# Altium PCB 70cm_13cm_diplexer.PcbDoc
Units mm, origin at the board's own origin, x right, y up, seen from the top; angles counter-clockwise.
Board outline 27.81 x 17.78 mm, 2 copper layers (Top Layer, Bottom Layer); 4 components, 4 nets, 20 pads, 93 vias.
Unrouted connection lines stored in the file: 2.
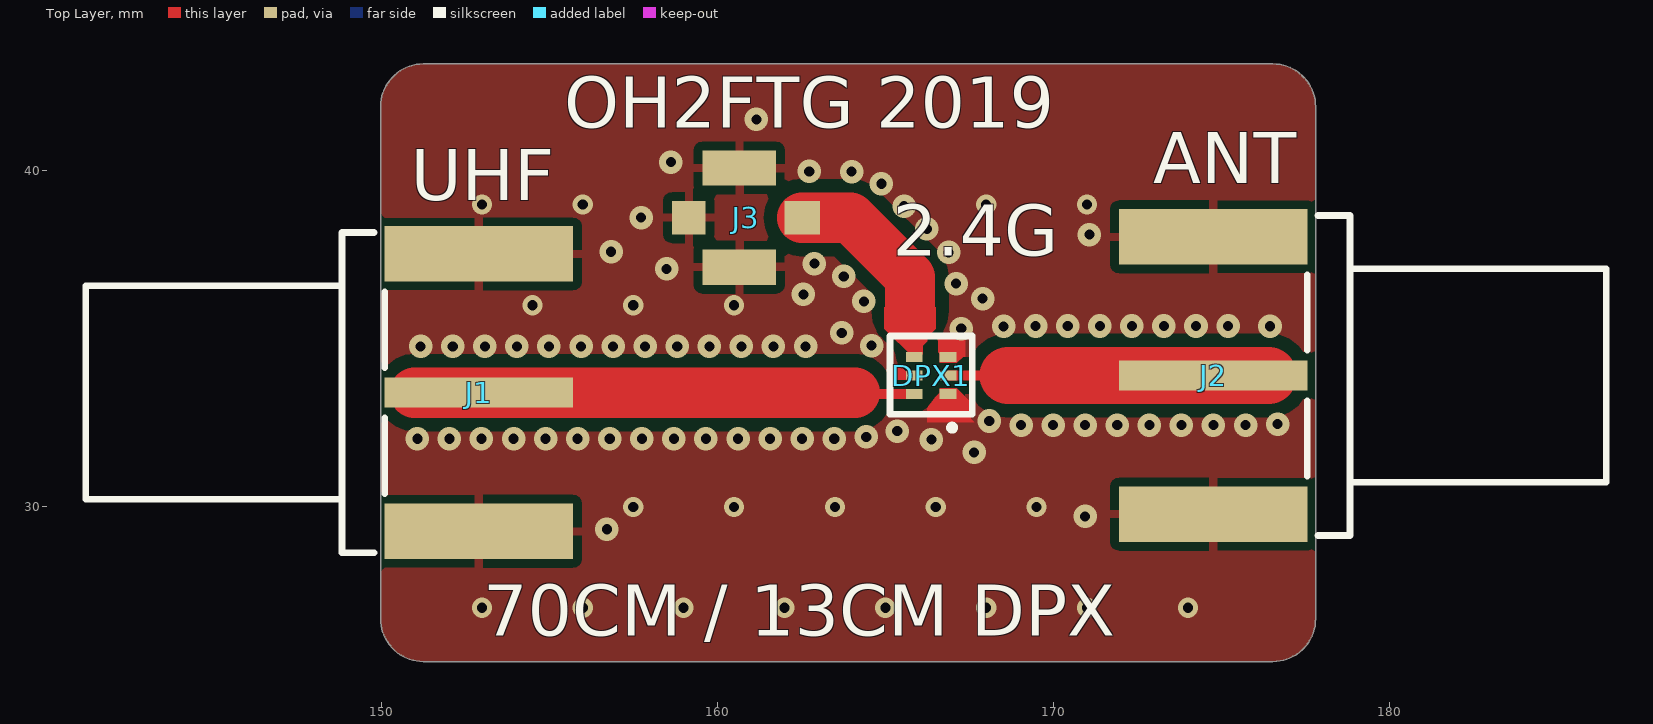
[diagram p0: Top Layer view]
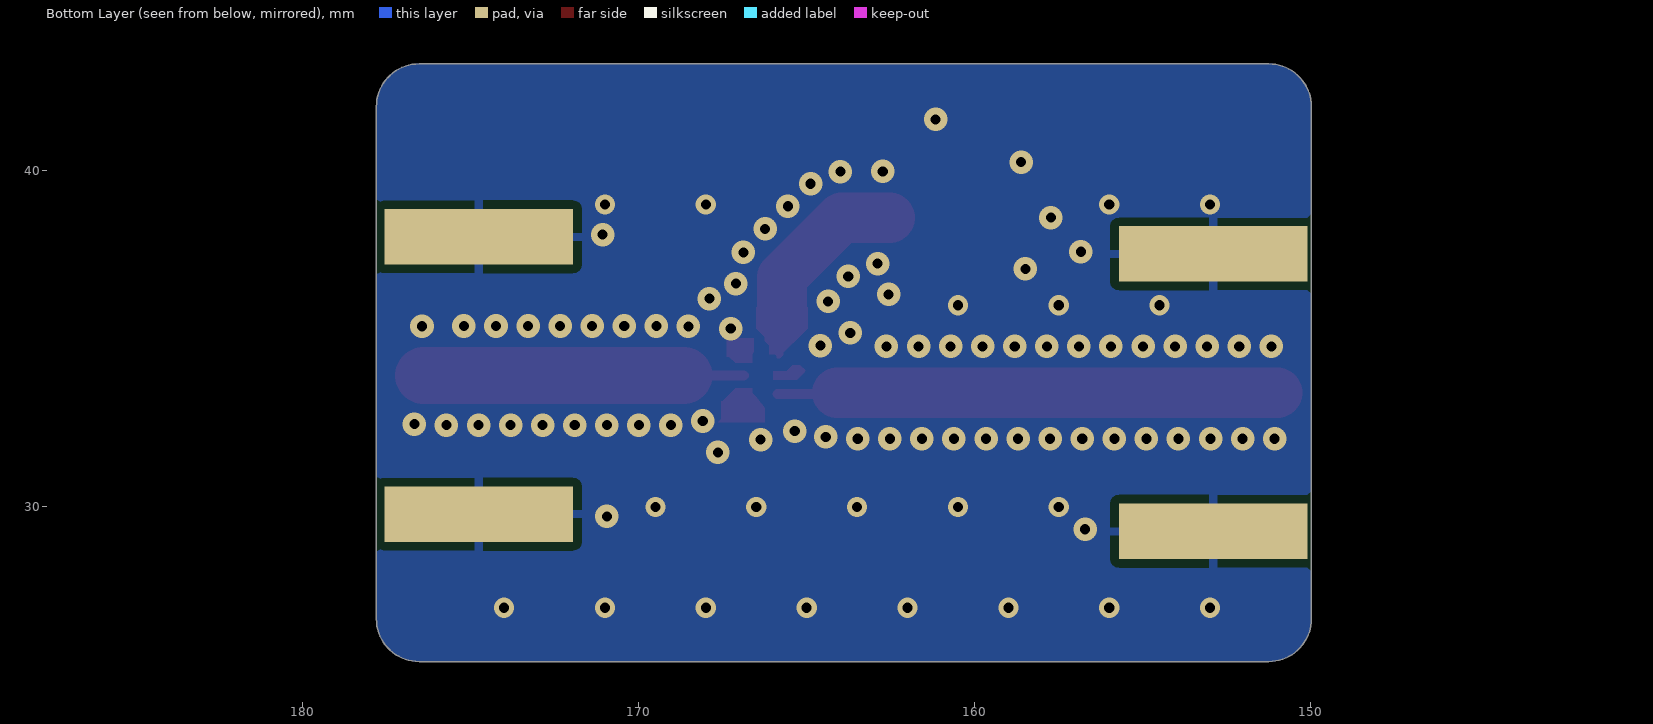
[diagram p1: Bottom Layer view, seen from below]
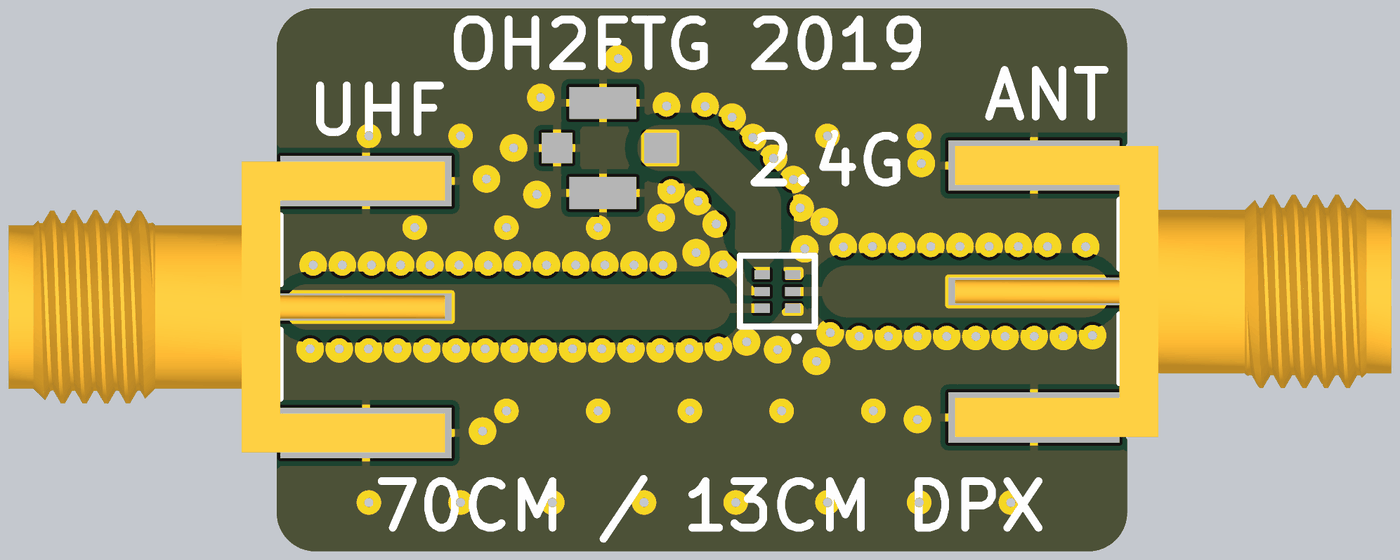
[diagram p2: 3D render of the assembled board from above, using the file's embedded part models]

## Layer stack, top to bottom
Top Solder: solder mask 0.0102, Solder Resist, Dk 3.5
Top Layer: signal copper 0.0356
Dielectric 1: dielectric 0.32, FR-4, Dk 4.8
Bottom Layer: signal copper 0.0356
Bottom Solder: solder mask 0.0102, Solder Resist, Dk 3.5

## Board outline
149.987,26.67 ccw(c151.257,26.67) 151.257,25.4 176.53,25.4 ccw(c176.53,26.67) 177.8,26.67 177.8,41.91 ccw(c176.53,41.91) 176.53,43.18 151.257,43.18 ccw(c151.257,41.91) 149.987,41.91

## Design rules (kind name [scope] priority, off if disabled: settings)
Clearance [All] p1: gap=0.254 ignorepadtopadclearanceinfootprint=FALSE except(0: Arc-Hole Track-Hole SMDPad-Hole THPad-Hole Via-Hole Fill-Hole Poly-Hole Region-Hole Text-Hole; 0.4: Arc-Fill Arc-Poly Arc-Region Track-Fill Track-Poly Track-Region)
PolygonConnect [All] p1: connectstyle=Relief reliefconductorwidth=0.254 reliefentries=4 polygonreliefangle="90 Angle" airgapwidth=0.254
RoutingVias [All] p1: holewidth=0.711 width=1.27 viastyle="Through Hole" minholewidth=0.711 minwidth=1.27 maxholewidth=0.711 maxwidth=1.27
SolderMaskExpansion [All] p1: expansion=0.102
Width [All] p1: maxlimit=1.7 minlimit=0.254 preferedwidth=1.7
30 further rules are at their usual default settings.

## Components (designator, comment, footprint, x,y, rotation, side; value= is the part's Value field where it differs from the comment)
DPX1 "DPX 430-960MHz/1700-2700MHz" "1.6x0.8mm [EIA 0603]" 166.862,33.359 r90 top
J1 "60312202114509" 60312202114509 152.908,33.401 r270 top
J2 "60312202114509" 60312202114509 174.752,33.909 r90 top
J3 "u.fl jack smd" "U.FL jack" 160.655,38.608 r0 top

## Footprints (in the part's own frame and the unit in brackets; to place one, negate y for a bottom-side part, rotate by r counter-clockwise, add the part's x,y. Pads: shape width x height; smd on the part's side, far side on the other; paste and mask are expansions set on the pad)
"1.6x0.8mm [EIA 0603]" [mm] "HHM22106C1 case"
  rect 0.3x0.5 smd: 1(0,0) 2(0.55,0) 3(1.1,0) 4(1.1,1) 5(0.55,1) 6(0,1)
  silkscreen extent -1.05,-0.72 1.73,1.73, body extent -0.25,0.1 1.35,0.9, height 0.6
60312202114509 [mm] "SMA PCB End Launch Jack Round  Post for 1.6mm PCB"
  rect 0.9x5.6 smd: 1(0,0)
  rect 1.65x5.6 smd: 2(-4.125,0) 3(4.125,0)
  rect 1.65x5.6 smd far side: 4(-4.125,0) 5(4.125,0)
  silkscreen extent -4.76,-11.69 4.76,-2.8, body extent -4.76,-11.69 4.76,2.58, height 4.36
"U.FL jack" [mm] "U.FL smd jack AMPhenol RF AMC series"
  rect 1.05x1 smd: 1(1.875,0)
  rect 1x1 smd: 2(-1.5,0)
  rect 2.2x1.05 smd: 2(0,-1.475) 2(0,1.475)
  body extent -1.5,-1.5 1.6,1.5, height 1.25

## Part data
DPX1: library part DPX202700DT-4062A1, "Diplexer 430-960MHz/1700-2700MHz 0603", Case Code (Imperial)=0805, Case Code (Metric)=2012, Manufacturer=TDK, Supplier Part Number 1=810-DPX20270DT4062A1, Manufacturer 1=TDK, Manufacturer Part Number=DPX202700DT-4062A1, Mount="Surface Mount", Packaging="Tape and Reel", Stock 1=2639, Supplier 1=Mouser
J1 J2: "WR-SMA SMA PCB End Launch Jack Round Post for 1.6 mm PCB", Frequency Range="DC~18 GHz", Operating Temperature="-65 to 165 degC", ComponentLink1Description=Manufacturer, ComponentLink1URL=http://www.we-online.de, ComponentLink2Description=Datasheet, ComponentLink2URL=https://katalog.we-online.de/em/datasheet/60312202114509.pdf, Connector Type=SMA, Gender=Jack, Impedance="50 Ohm", Mounting Technology=SMT, Orientation Type=Straight, Packaging=Tray, Part Number=60312202114509, Published Date="August 2018", Publisher="Wurth Elektronik"
J3: library part "u.fl connector, jack A-1JB", Frequency Max=6GHz, Manufacturer 1="Amphenol / Amphenol RF", Manufacturer Part Number 1=A-1JB, Supplier Part Number 1=523-A-1JB, Body Style="Straight Jack", Coaxial Termination=Solder, ComponentLink1Description=https://datasheet.ciiva.com/22652/689597-22652949.pdf, ComponentLink1URL=https://datasheet.ciiva.com/22652/689597-22652949.pdf, ComponentLink2Description=https://datasheet.ciiva.com/15172/getdatasheetpartid-168895-15172647.pdf, ComponentLink2URL=https://datasheet.ciiva.com/15172/getdatasheetpartid-168895-15172647.pdf, ComponentLink3Description=https://datasheet.ciiva.com/36526/2036357-36526267.pdf, ComponentLink3URL=https://datasheet.ciiva.com/36526/2036357-36526267.pdf, ComponentLink4Description=https://datasheet.ciiva.com/5175/ca-1jb-38743-5175829.pdf, ComponentLink4URL=https://datasheet.ciiva.com/5175/ca-1jb-38743-5175829.pdf, ComponentLink5Description=https://datasheet.ciiva.com/3132/ca-1jb-3132240.pdf, ComponentLink5URL=https://datasheet.ciiva.com/3132/ca-1jb-3132240.pdf, ComponentLink6Description=https://datasheet.ciiva.com/14157/04614608-14157589.pdf, ComponentLink6URL=https://datasheet.ciiva.com/14157/04614608-14157589.pdf, ComponentLink7Description=https://datasheet.ciiva.com/643/ca-1jb-643532.pdf, ComponentLink7URL=https://datasheet.ciiva.com/643/ca-1jb-643532.pdf, ComponentLink8Description=https://datasheet.ciiva.com/14565/70142555-14565783.pdf, ComponentLink8URL=https://datasheet.ciiva.com/14565/70142555-14565783.pdf, ComponentLink9Description=https://datasheet.ciiva.com/643/ca-1jb-643531.pdf, ComponentLink9URL=https://datasheet.ciiva.com/643/ca-1jb-643531.pdf, Connector Type="AMC Coaxial", Contact Material=Brass, Contact Plating=Gold, Impedance=50ohm, Pricing 1="1=0.65, 10=0.596, 50=0.535, 100=0.51, 1000=0.365, 10000=0.351 (USD)", Stock 1=19506, Supplier 1=Mouser

## Via types
v1: diameter 0.7, hole 0.3, Top Layer to Bottom Layer, 73 vias
v2: diameter 0.6, hole 0.3, Top Layer to Bottom Layer, 20 vias

## Nets (pads, with @x,y where several pads share a name; then routed paths per layer and width w, separated by ;. In a path a pad name is that pad's centre, name@x,y a point inside that pad or via, vN(x,y) a via of type N, cw(c..) or ccw(c..) an arc to the next point about the centre after c; other vN are vias at no path point)
GND: DPX1.1 DPX1.3 DPX1.5 J1.2 J1.3 J1.4 J1.5 J2.2 J2.3 J2.4 J2.5 J3.2
  other v1: 156.718,29.337 170.942,29.718 167.64,31.623 166.37,32.004 167.894,36.195 162.56,36.322 158.496,37.084 156.845,37.592 171.069,38.1 157.734,38.608 158.623,40.259 161.163,41.529
  other v2: 153,27 156,27 159,27 162,27 165,27 168,27 171,27 174,27 157.5,30 160.5,30 163.5,30 166.5,30 169.5,30 154.5,36 157.5,36 160.5,36 153,39 156,39 168,39 171,39
NetDPX1_2: DPX1.2 J2.1 | length 7.7
  Top Layer w1.7: 168.656,33.909 J2.1 J2.1@176.403,33.909
NetDPX1_4: DPX1.4 J3.1 | length 5
  Top Layer w1.5: J3.1 163.957,38.608 165.735,36.83 165.735,35.814
NetDPX1_6: DPX1.6 J1.1 | length 13.1
  Top Layer w1.5: J1.1@151.003,33.401 J1.1 164.084,33.401
copper on no net: | length 4.5
  Top Layer w0.1: 164.592,33.274 cw(c164.677,33.274) 164.677,33.359 ; 165.735,35.814 165.735,34.586 ccw(c165.862,34.586) 165.862,34.459
  Top Layer w0.3: 164.677,33.359 165.862,33.359 ; 166.862,33.909 168.656,33.909
  other v1: 151.078,32.029 152.032,32.029 152.986,32.029 153.94,32.029 154.894,32.029 155.848,32.029 156.802,32.029 157.756,32.029 158.71,32.029 159.664,32.029 160.618,32.029 161.572,32.029 162.526,32.029 163.48,32.029 164.433,32.084 165.354,32.258 169.038,32.436 169.992,32.436 170.946,32.436 171.9,32.436 172.854,32.436 173.808,32.436 174.762,32.436 175.716,32.436 176.669,32.466 168.091,32.556 151.178,34.773 152.132,34.773 153.086,34.773 154.04,34.773 154.994,34.773 155.948,34.773 156.902,34.773 157.856,34.773 158.81,34.773 159.764,34.773 160.718,34.773 161.672,34.773 162.626,34.773 164.592,34.798 163.703,35.179 167.259,35.306 168.518,35.369 169.472,35.382 170.426,35.382 171.38,35.382 172.334,35.382 173.288,35.382 174.242,35.382 175.196,35.382 176.443,35.374 164.363,36.117 167.107,36.644 163.764,36.86 162.887,37.236 166.884,37.571 166.235,38.271 165.561,38.945 164.881,39.615 162.736,39.98 163.997,39.972

## Polygon pours and split planes (outlines as drawn)
GND on Top Layer "Top Layer-GND" (solid, pour order 0): 149.987,26.67 ccw(c151.257,26.67) 151.257,25.4 176.53,25.4 ccw(c176.53,26.67) 177.8,26.67 177.8,41.91 ccw(c176.53,41.91) 176.53,43.18 151.257,43.18 ccw(c151.257,41.91) 149.987,41.91
GND on Bottom Layer "Bottom Layer-GND" (solid, pour order 1): 149.987,26.67 ccw(c151.257,26.67) 151.257,25.4 176.53,25.4 ccw(c176.53,26.67) 177.8,26.67 177.8,41.91 ccw(c176.53,41.91) 176.53,43.18 151.257,43.18 ccw(c151.257,41.91) 149.987,41.91

## Other copper
Top Layer:
  region net GND: 165.089,33.981 165.287,33.782 165.989,33.782 165.989,34.036 165.608,34.036 165.423,34.221 165.191,34.221 165.029,34.059
  region net GND: 166.497,33.274 166.243,32.949 166.243,32.512 167.64,32.512 167.535,32.617 167.535,33.147 167.513,33.147 167.132,33.528 166.624,33.528 166.624,33.401
  region net GND: 166.624,34.544 166.569,34.599 166.569,35.012 167.346,35.012 167.371,35.037 167.371,34.47 167.312,34.47 167.132,34.29 166.624,34.29 166.624,34.417 166.624,34.544 166.624,34.654 166.606,34.871
  region net NetDPX1_4: 164.973,35.306 164.973,35.941 166.497,35.941 166.497,35.306 166.243,35.052 166.243,34.925 166.116,34.798 166.116,34.544 165.947,34.544 165.841,34.438

## Silkscreen, mask and mechanical layers (free items; w line width, h text height)
Top Overlay:
  text "OH2FTG 2019" at 155.448,41.275 h1.52
  text "ANT" at 172.974,39.624 h1.52
  text "UHF" at 150.876,39.116 h1.52
  text "2.4G" at 165.227,37.465 h1.52
  text "70CM / 13CM DPX" at 153.035,26.162 h1.52
Mechanical 13:
  the board outline again, w0.1

## Dimensions
176.53,43.18 to 176.53,25.4 on Mechanical 1
149.987,26.67 to 177.8,26.67 on Mechanical 1

## Text inside footprints (layer, text, board x,y; h text height)
J1: Mechanical 2 "PCB Thickness 1.6mm" at 140.508,36.801 h0.8 r270; Mechanical 2 "PCB End" at 149.408,34.901 h0.8 r270
J2: Mechanical 2 "PCB Thickness 1.6mm" at 187.152,30.509 h0.8 r90; Mechanical 2 "PCB End" at 178.252,32.409 h0.8 r90